# EAGLE board Electronics_Design_PlantSynth_BRD_v130 (EAGLE 9.7.0)
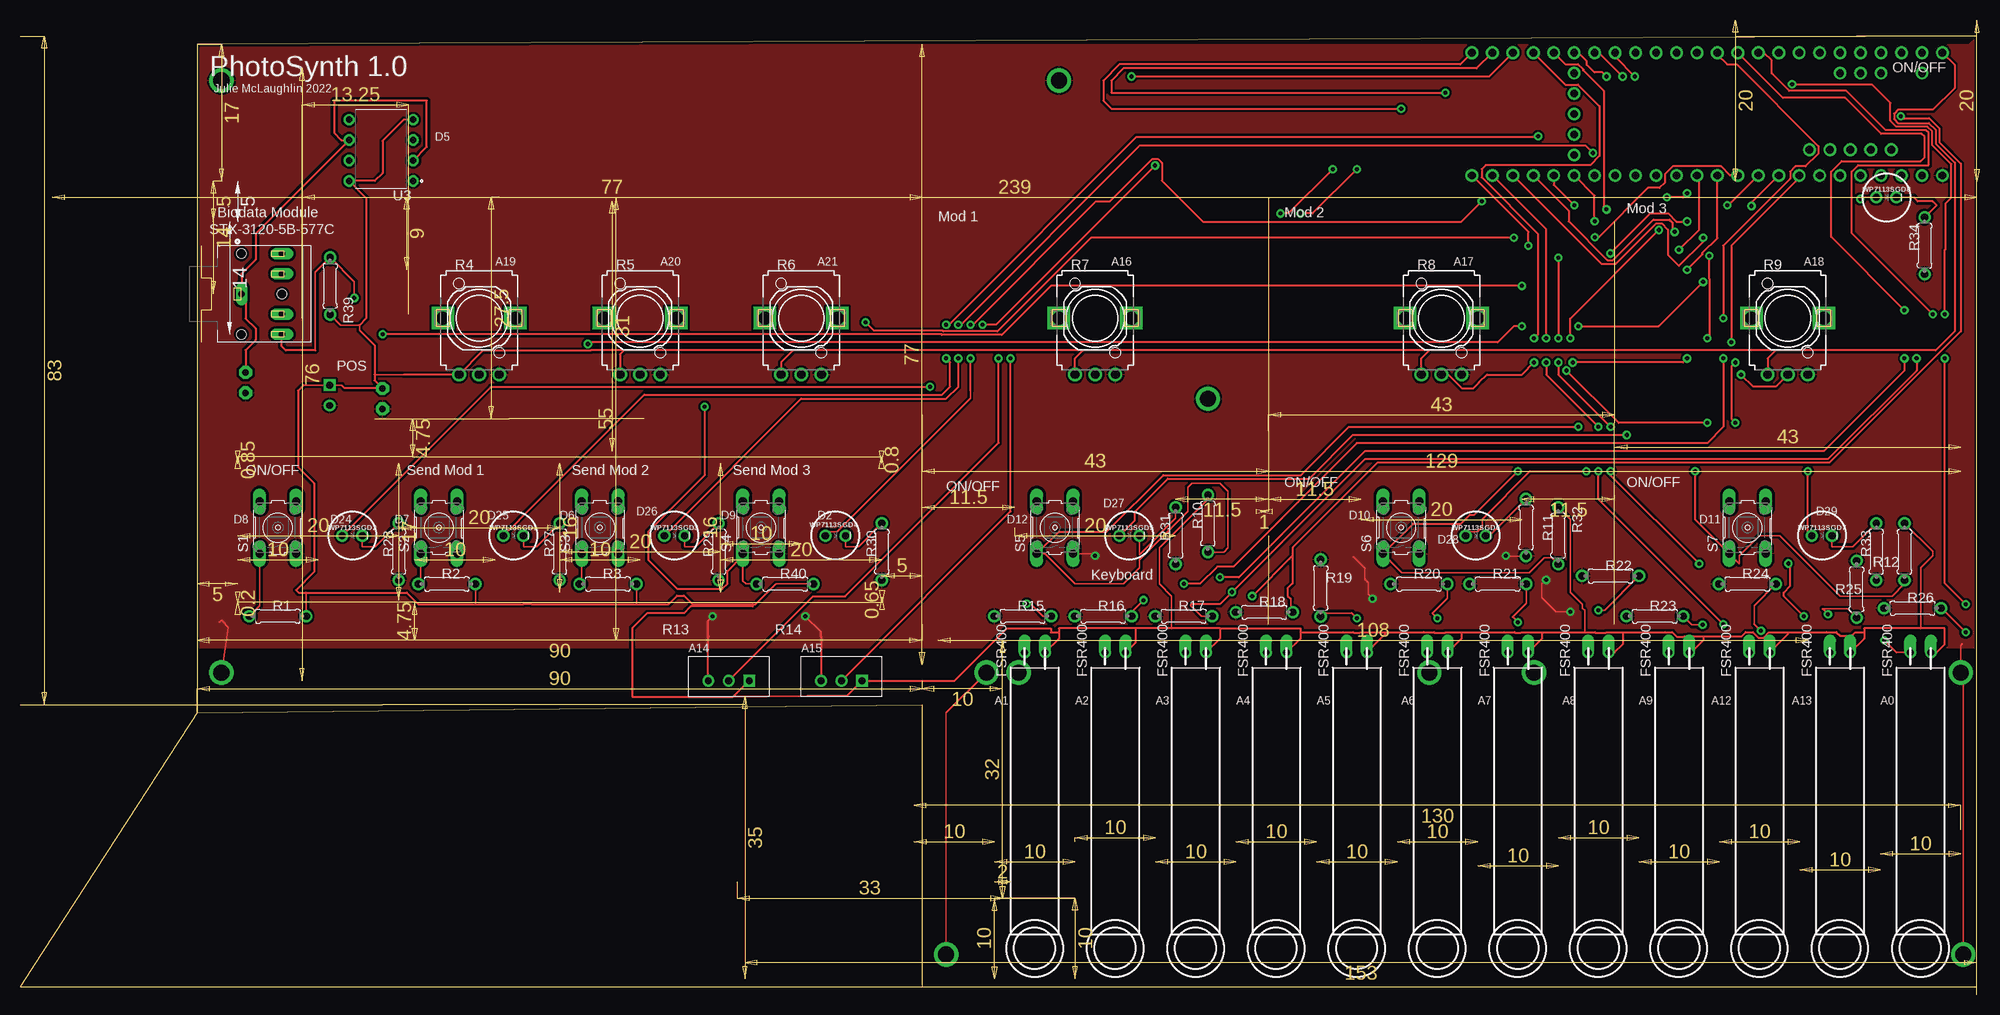
[diagram p0: board, top side]
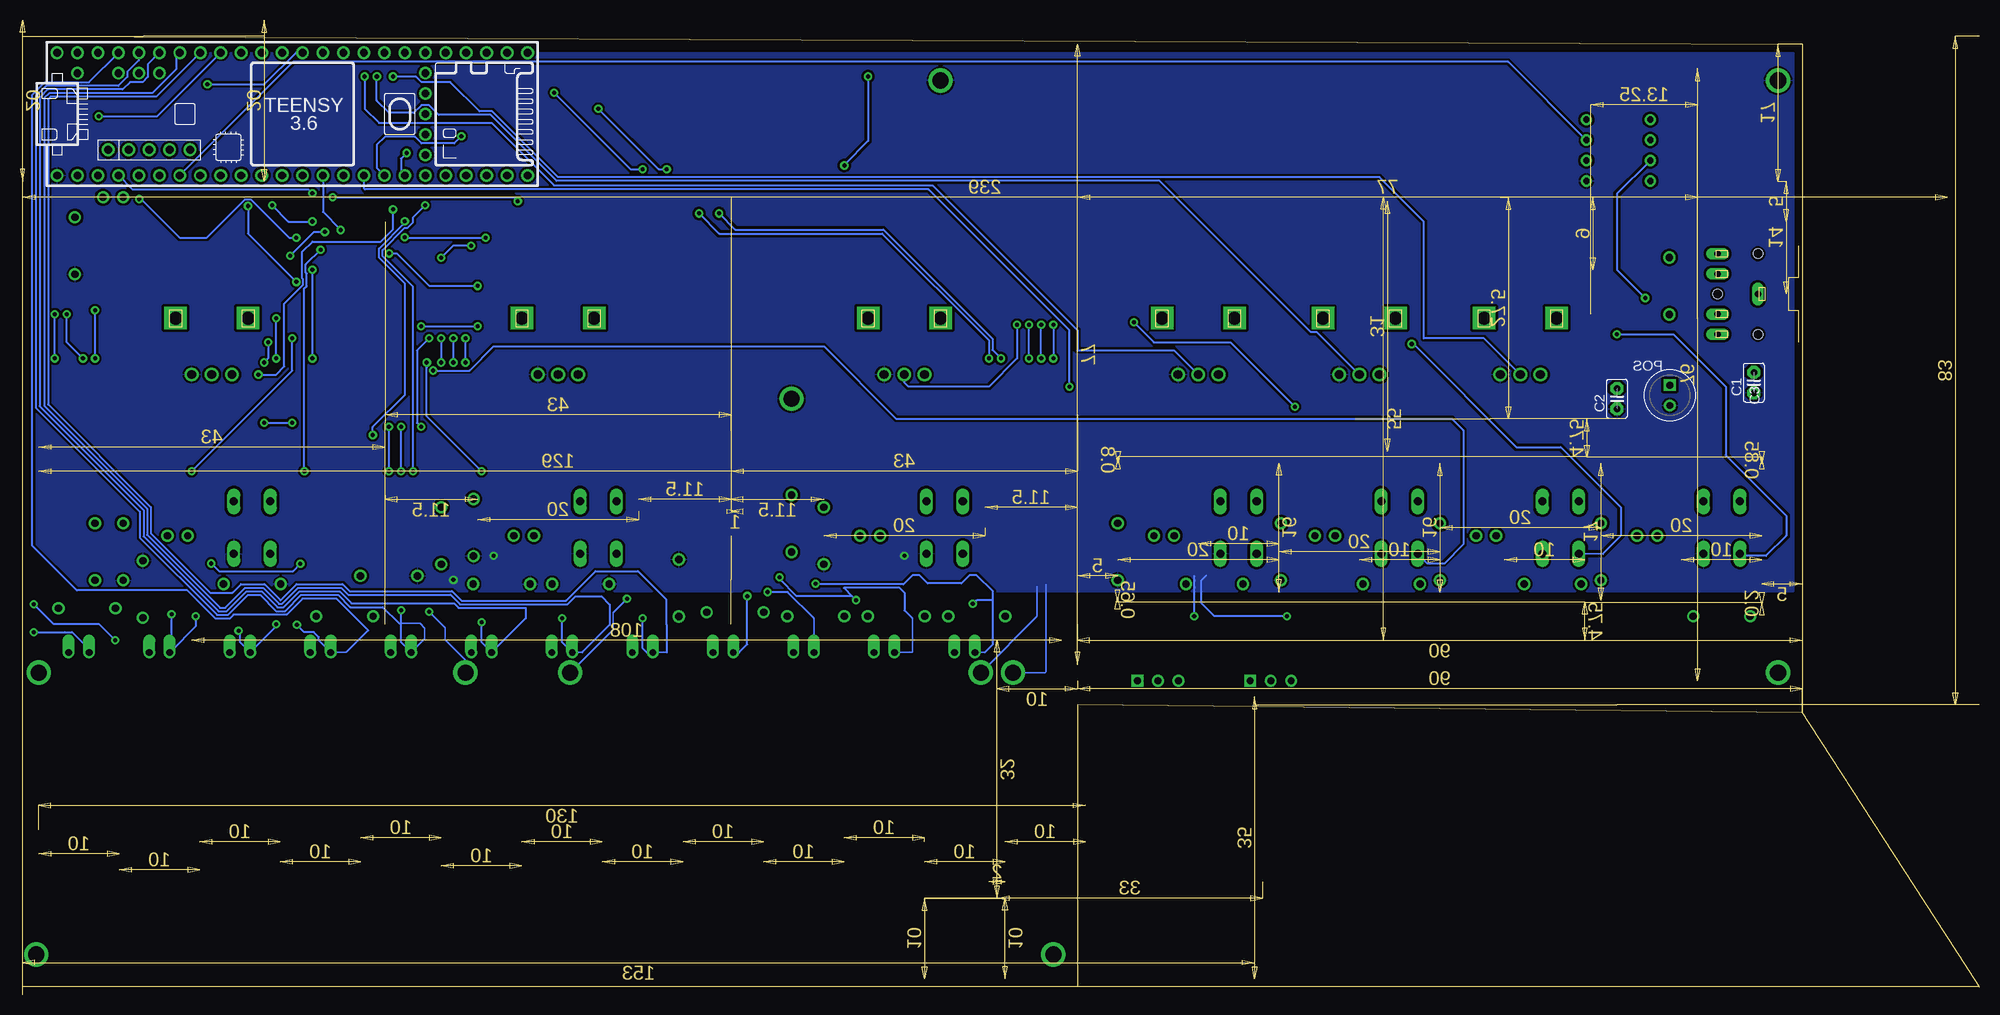
[diagram p1: board, bottom side, seen from below]

Size 243 x 118 mm. Coordinates in mm from the lower left corner, seen from the top.
Outline: 112,0 0,0 22,34
Outline: 112,0 243,0 243,118 22,117 22,34
Outline: 22,34 112,35 112,0
Copper layers (1*16): Top 0.035mm / dielectric 1.5mm / Bottom 0.035mm
Design rules "SparkFun": minimum track width 8mil, minimum drill 20mil, track to track 8mil, track to pad 8mil, pad to pad 8mil, via to via 8mil, smd to smd 8mil, copper to edge 8mil, drill to drill 8mil, minimum pad ring 12mil, minimum via ring 10mil, stop-mask expansion 4mil, vias tented up to drill 20mil, thermal gap 10mil

## Footprints (pad centres in the part's own frame; a part is rotated, then mirrored left to right if it is on the bottom)
C2.5-2 = drill 0.813 pad 1.6 octagon: 1 -1.27,0; 2 1.27,0
ESK476M050AE3EA_47UF_CAP = drill 0.85 pad 1.45 square: LL+ -1.27,0 | drill 0.85 pad 1.45: LL- 1.27,0
FSR400_.85 = drill 0.85 offset: P$1 -1.27,17; P$2 1.27,17
MOUNTEDHOLE = drill 2: P$1 0,0
0204/5 = drill 0.9: 1 -3.54,0; 2 3.54,0
EVUFXL = drill 1.1 pad 1.676: GND 2.5,-7; IN 0,-7; PWR -2.5,-7 | drill 1.6 pad 2.8 square: M1 4.5,0; M2 -4.5,0
B3B-XH-A = drill 0.85: GND -2.545,0; IN -0.005,0 | drill 0.85 square: POWER 2.545,0
B3F-10XX = drill 1.016 long: 1 -3.251,2.261; 2 3.251,2.261; 3 -3.251,-2.261; 4 3.251,-2.261
STX-3120-5B-577C = drill 0.8 long: 1 0.5,0; 2 5.5,-5; 3 5.5,-2.5; 4 5.5,2.5; 5 5.5,5 | hole 1.2: 0.5,5; 5.5,0; 0.5,-5
LMC555CN/NOPB-ND = drill 0.78 pad 1.13: 1 -6.51,5.08; 2 -6.51,2.54; 3 -6.51,0; 4 -6.51,-2.54; 5 1.43,-2.54; 6 1.43,0; 7 1.43,2.54; 8 1.43,5.08
TEENSY_3.5/3.6 = drill 0.965: 0/RX -25.4,-7.62; 1/TX -22.86,-7.62; 2 -20.32,-7.62; 3/CANTX -17.78,-7.62; 3V3 7.62,-7.62; 3V3_2 17.78,-2.54; 3V3_LO -22.86,7.62; 4/CANRX -15.24,-7.62; 5 -12.7,-7.62; 6 -10.16,-7.62; 7 -7.62,-7.62; 8 -5.08,-7.62; 9/CS -2.54,-7.62; 10/CS 0,-7.62; 11/MOSI 2.54,-7.62; 12/MISO 5.08,-7.62; 13/SCK 5.08,7.62; 14/A0 2.54,7.62; 15/A1 0,7.62; 16/A2 -2.54,7.62; 17/A3 -5.08,7.62; 18/A4/SDA -7.62,7.62; 19/A5/SCL -10.16,7.62; 20/A6 -12.7,7.62; 21/A7 -15.24,7.62; 21/DAC0 12.7,7.62; 22/A8 -17.78,7.62; 23/A9 -20.32,7.62; 24 10.16,-7.62; 25 12.7,-7.62; 26 15.24,-7.62; 27 17.78,-7.62; 28 20.32,-7.62; 29 22.86,-7.62; 30 25.4,-7.62; 31/A12 27.94,-7.62; 32/A13 30.48,-7.62; 33/A14 30.48,7.62; 34/A15 27.94,7.62; 35/A16 25.4,7.62; 36/A17 22.86,7.62; 37/A18 20.32,7.62; 38/A19 17.78,7.62; 39/A20 15.24,7.62; A10 -17.78,5.08; A11 -15.24,5.08; A22/DAC1 10.16,7.62; AGND -25.4,7.62; AREF -20.32,5.08; GND -27.94,-7.62; GND2 7.62,7.62; GND3 17.78,0; PROG 17.78,2.54; RESET 17.78,5.08; U5V -21.59,-4.445; UD+ -16.51,-4.445; UD- -19.05,-4.445; UGND1 -13.97,-4.445; UGND2 -11.43,-4.445; VBAT 17.78,-5.08; VIN -27.94,7.62; VUSB -25.4,5.08
LEDGREENDIFFUSED5MM = drill 0.9: A+ -1,0; C- 1.5,0

## Placement (x,y rotation side)
C1  4700pF  [C2.5-2]  28,75 90 bottom
C2  0.1uF  [C2.5-2]  45,73 90 bottom
C3  47uF  [ESK476M050AE3EA_47UF_CAP]  38.43,73.42 270 bottom
FSR1  FSR400_0.85  [FSR400_.85]  126,24.5 0 top
FSR2  FSR400_0.85  [FSR400_.85]  136,24.5 0 top
FSR3  FSR400_0.85  [FSR400_.85]  146,24.5 0 top
FSR4  FSR400_0.85  [FSR400_.85]  156,24.5 0 top
FSR5  FSR400_0.85  [FSR400_.85]  166,24.5 0 top
FSR6  FSR400_0.85  [FSR400_.85]  176,24.5 0 top
FSR7  FSR400_0.85  [FSR400_.85]  186,24.5 0 top
FSR8  FSR400_0.85  [FSR400_.85]  196,24.5 0 top
FSR9  FSR400_0.85  [FSR400_.85]  206,24.5 0 top
FSR10  FSR400_0.85  [FSR400_.85]  216,24.5 0 top
FSR11  FSR400_0.85  [FSR400_.85]  226,24.5 0 top
FSR12  FSR400_0.85  [FSR400_.85]  236,24.5 0 top
GND  MOUNTINGHOLE  [MOUNTEDHOLE]  120,39 0 top
GND37  MOUNTINGHOLE  [MOUNTEDHOLE]  241.3,4 0 top
GND38  MOUNTINGHOLE  [MOUNTEDHOLE]  147.5,73 0 top
R1  10k  [0204/5]  32,46 0 top
R2  10k  [0204/5]  53,50 0 top
R3  10k  [0204/5]  73,50 0 top
R4  EVU-F3LFL3D14F3L  [EVUFXL]  57,83 0 top
R5  EVU-F3LFL3D14F3L  [EVUFXL]  77,83 0 top
R6  EVU-F3LFL3D14F3L  [EVUFXL]  97,83 0 top
R7  EVU-F3LFL3D14F3L  [EVUFXL]  133.5,83 0 top
R8  EVU-F3LFL3D14F3L  [EVUFXL]  176.5,83 0 top
R9  EVU-F3LFL3D14F3L  [EVUFXL]  219.5,83 0 top
R10  10k  [0204/5]  147.5,57.5 90 top
R11  10k  [0204/5]  191,56 90 top
R12  10k  [0204/5]  234,54 90 top
R13  [B3B-XH-A]  88,38 0 top
R14  [B3B-XH-A]  102,38 0 top
R15  10k  [0204/5]  124.5,46 0 top
R16  10k  [0204/5]  134.5,46 0 top
R17  10k  [0204/5]  144.5,46 0 top
R18  10k  [0204/5]  154.5,46.5 0 top
R19  10k  [0204/5]  161.5,49.5 270 top
R20  10k  [0204/5]  173.71,50 0 top
R21  10k  [0204/5]  183.5,50 0 top
R22  10k  [0204/5]  197.5,51 0 top
R23  10k  [0204/5]  203,46 0 top
R24  10k  [0204/5]  214.5,50 0 top
R25  10k  [0204/5]  228.06,49.34 270 top
R26  10k  [0204/5]  235,47 0 top
R27  125  [0204/5]  67,54 90 top
R28  125  [0204/5]  47,54 90 top
R29  125  [0204/5]  86.75,54 90 top
R30  125  [0204/5]  107,54 90 top
R31  125  [0204/5]  143.5,56 90 top
R32  125  [0204/5]  187,57 90 top
R33  125  [0204/5]  230.5,54 90 top
R34  125  [0204/5]  236.5,92 90 top
R39  100k  [0204/5]  38.5,87 270 top
R40  10k  [0204/5]  95,50 0 top
S1  [B3F-10XX]  32,57 90 top
S2  [B3F-10XX]  52,57 90 top
S3  [B3F-10XX]  72,57 90 top
S4  [B3F-10XX]  92,57 90 top
S5  [B3F-10XX]  128.5,57 90 top
S6  [B3F-10XX]  171.5,57 90 top
S7  [B3F-10XX]  214.5,57 90 top
STX-3120-5B-577C  STX-3120-5B-577C  [STX-3120-5B-577C]  27,86 0 top
U3  LMC555CN  [LMC555CN/NOPB-ND]  42.29,105.11 180 top
U$1  TEENSY_3.5/3.6  [TEENSY_3.5/3.6]  210.77,108.34 0 bottom
U$2  MOUNTINGHOLE  [MOUNTEDHOLE]  115,4 0 top
U$3  MOUNTINGHOLE  [MOUNTEDHOLE]  124,39 0 top
U$4  MOUNTINGHOLE  [MOUNTEDHOLE]  175,39 0 top
U$5  MOUNTINGHOLE  [MOUNTEDHOLE]  241,39 0 top
U$6  MOUNTINGHOLE  [MOUNTEDHOLE]  188,39 0 top
U$7  MOUNTINGHOLE  [MOUNTEDHOLE]  25,112.5 0 top
U$8  MOUNTINGHOLE  [MOUNTEDHOLE]  129,112.5 0 top
U$9  MOUNTINGHOLE  [MOUNTEDHOLE]  25,39 0 top
WP7113SGD1  [LEDGREENDIFFUSED5MM]  61,56 0 top
WP7113SGD2  [LEDGREENDIFFUSED5MM]  41,56 0 top
WP7113SGD3  [LEDGREENDIFFUSED5MM]  81,56 0 top
WP7113SGD4  [LEDGREENDIFFUSED5MM]  101,56 0 top
WP7113SGD5  [LEDGREENDIFFUSED5MM]  137.5,56 0 top
WP7113SGD6  [LEDGREENDIFFUSED5MM]  180.5,56 0 top
WP7113SGD7  [LEDGREENDIFFUSED5MM]  223.5,56 0 top
WP7113SGD8  [LEDGREENDIFFUSED5MM]  231.5,98 0 top

## Library data of the parts
C1 C2 = capacitor-wima
C3 = Capacitor_47uF
FSR1-FSR12 = FSR400
GND GND37 GND38 U$2-U$9 = MOUNTEDHOLE
R1-R3 R10-R12 R15-R34 R39 R40 = RESISTOR_Stand
R4-R9 = EVU-F3LFL3D14_US
R13 R14 = Pot_16mm
S1-S7 = B3F-1020_OMRON; MPN: B3F-1000; OC_FARNELL: 176432; OC_NEWARK: 36M3542
STX-3120-5B-577C = STX-3120-5B-577C
U3 = LMC555CN:NOPB-ND
U$1 = Teensy356
WP7113SGD1-WP7113SGD8 = KingBright_LED_WP7113SGD

## Nets
2: U$1.2 WP7113SGD4.A+
3: U$1.3/CANTX
4: U$1.4/CANRX
5: U3.3 U$1.5
6: R3.1 S3.1 U$1.6
7: R2.1 S2.1 U$1.7
8: R1.1 S1.1 U$1.8
9: R40.1 S4.1 U$1.9/CS
10: R11.1 S6.1 U$1.10/CS
11: R12.1 S7.1 U$1.11/MOSI
12: R10.1 S5.1 U$1.12/MISO
24: U$1.24 WP7113SGD2.A+
25: U$1.25 WP7113SGD1.A+
26: U$1.26 WP7113SGD3.A+
27: U$1.27 WP7113SGD5.A+
28: U$1.28 WP7113SGD6.A+
29: U$1.29 WP7113SGD7.A+
30: U$1.30 WP7113SGD8.A+
A0: FSR12.P$1 R26.2 U$1.14/A0
A1: FSR1.P$1 R15.2 U$1.15/A1
A2: FSR2.P$1 R16.2 U$1.16/A2
A3: FSR3.P$1 R17.2 U$1.17/A3
A4: FSR4.P$1 R18.2 U$1.18/A4/SDA
A5: FSR5.P$1 R19.2 U$1.19/A5/SCL
A6: FSR6.P$1 R20.2 U$1.20/A6
A7: FSR7.P$1 R21.2 U$1.21/A7
A8: FSR8.P$1 R22.2 U$1.22/A8
A9: FSR9.P$1 R23.2 U$1.23/A9
A12: FSR10.P$1 R24.2 U$1.31/A12
A13: FSR11.P$1 R25.2 U$1.32/A13
A14: R13.IN U$1.33/A14
A15: R14.IN U$1.34/A15
A16: R7.IN U$1.35/A16
A17: R8.IN U$1.36/A17
A18: R9.IN U$1.37/A18
A19: R4.IN U$1.38/A19
A20: R5.IN U$1.39/A20
A21: R6.IN U$1.21/DAC0
A22: U$1.A22/DAC1
GND: C1.1 C2.1 C3.LL- GND37.P$1 GND38.P$1 GND.P$1 R4.GND R5.GND R6.GND R7.GND R8.GND R9.GND R13.GND R14.GND R15.1 R16.1 R17.1 R18.1 R19.1 R20.1 R21.1 R22.1 R23.1 R24.1 R25.1 R26.1 R27.1 R28.1 R29.1 R30.1 R31.1 R32.1 R33.1 R34.1 S1.3 S2.3 S3.3 S4.3 S5.3 S6.3 S7.3 U3.1 U$1.GND U$2.P$1 U$3.P$1 U$4.P$1 U$5.P$1 U$6.P$1 U$7.P$1 U$8.P$1 U$9.P$1
N$1: R28.2 WP7113SGD2.C-
N$2: R27.2 WP7113SGD1.C-
N$3: R29.2 WP7113SGD3.C-
N$4: R30.2 WP7113SGD4.C-
N$5: R31.2 WP7113SGD5.C-
N$6: R32.2 WP7113SGD6.C-
N$7: R33.2 WP7113SGD7.C-
N$8: R34.2 WP7113SGD8.C-
SLEEVE: C1.2 STX-3120-5B-577C.1 U3.2 U3.6
TIP: R39.1 STX-3120-5B-577C.2 U3.7
VCC: C2.2 C3.LL+ FSR1.P$2 FSR2.P$2 FSR3.P$2 FSR4.P$2 FSR5.P$2 FSR6.P$2 FSR7.P$2 FSR8.P$2 FSR9.P$2 FSR10.P$2 FSR11.P$2 FSR12.P$2 R1.2 R2.2 R3.2 R4.PWR R5.PWR R6.PWR R7.PWR R8.PWR R9.PWR R10.2 R11.2 R12.2 R13.POWER R14.POWER R39.2 R40.2 U3.4 U3.8 U$1.VIN

## Tracks (layer width: path | path; a pad name or v marks a point on that pad's centre or on a via)
2  (via drill 0.51)
  Top 0.203: WP7113SGD4.A+ 100.48,56.48 101.44,56.48 118,73.04 118,74
  Top 0.243: 118,74 v118,78 | v207,98.5 206.5,98 v204.5,98 | v181.5,97.5 179,95 146.86,95 141.78,100.08 141.78,102.29 141.29,102.78 140.6,102.78 135.32,97.5 133.62,97.5 118.32,82.2 v118,82.2
  Bottom 0.243: v181.5,97.5 182,98 v204.5,98 | v207,98.5 207.5,99 229.37,99 U$1.2 | v118,78 v118,82.2
5
  Bottom 0.243: U3.3 58.52,114.83 209.37,114.83 U$1.5
6  (via drill 0.51)
  Top 0.203: S3.1 69.74,50.41 69.46,50.13 R3.1
  Top 0.243: U$1.6 220.93,100.43 212.5,92 v212.5,80 | v213,77.5 212.5,77 212.5,70.5 v213,70 | v209.5,70 198.5,70 v192,76.5
  Bottom 0.203: 69.74,53.74 S3.1
  Bottom 0.243: v212.5,80 212.5,78 v213,77.5 | v213,70 v209.5,70 | v192,76.5 187.5,76.5 184.5,79.5 143.5,79.5 134.5,70.5 65.5,70.5 64.08,69.08 64.08,54.92 66.46,52.54 68.54,52.54 69.74,53.74
7  (via drill 0.51)
  Top 0.203: S2.1 49.74,50.41 49.46,50.13 R2.1
  Top 0.243: U$1.7 215,97.33 v215,96.93 | v186.5,82 185.5,82 183.5,80 70.7,80 v70.5,79.8 | v193.5,82 203.49,82 v208.99,87.5
  Bottom 0.203: 46.75,53.75 S2.1
  Bottom 0.243: v193.5,82 v186.5,82 | 46.75,53.75 44.5,56 44.5,59.5 52,67 57.5,67 70.3,79.8 v70.5,79.8 | v208.99,87.5 215,93.51 v215,96.93
8  (via drill 0.51)
  Top 0.203: S1.1 29.74,50.5 29.74,50.41 29.74,47.28 R1.1
  Top 0.243: U$1.8 212.12,97 v212,97 | v186.5,87 128,87 121.92,80.92 114.47,80.92 114.39,81 v45,81 | v207,95 205.67,95 204.67,96 202.43,96 v197.46,91.04
  Bottom 0.203: 29.49,53.5 S1.1
  Bottom 0.243: v212,97 210,95 v207,95 | v186.5,87 192.5,87 196.54,91.04 v197.46,91.04 | v45,81 38,81 31.5,74.5 31.5,66 24,58.5 24,56 26.5,53.5 29.49,53.5
9  (via drill 0.51)
  Top 0.203: S4.1 89.74,53.5 | R40.1 90.15,50 89.74,50.41
  Top 0.243: 89.74,50.41 89.74,53.5 87.83,51.59 87.83,50.01 87.19,49.38 81.61,49.38 78,52.99 78,56.5 85,63.5 v85,72 | v185.5,93 133,93 121.37,81.37 114.66,81.37 114.58,81.45 106.05,81.45 v105,82.5 | v195.54,93.04 196.04,93.04 202.16,99.16 203.59,99.16 204.26,99.83 204.26,100.87 205.23,101.83 211.23,101.83 212.34,100.72 U$1.9/CS
  Bottom 0.243: v185.5,93 195.5,93 v195.54,93.04 | v105,82.5 102.5,80 93,80 v85,72
10  (via drill 0.51)
  Top 0.203: 172.99,57.5 S6.1 171.59,51.4 187.44,51.4 189.27,53.23 190.23,53.23 R11.1
  Top 0.243: v207,78 206.5,77.5 v192.8,77.5 | v207,89 208.91,90.91 208.91,91.1 210.77,92.95 U$1.10/CS | v186,64 180.62,58.62 180.05,58.62 178.93,57.5 172.99,57.5
  Bottom 0.243: v207,78 v207,89 | v192.8,77.5 192.8,76.88 192.83,76.84 192.83,70.83 v186,64
11  (via drill 0.51)
  Top 0.203: 208,57.99 S7.1 213.49,52.49 213.49,53.49 216,56 218.5,56 226,48.5 232.5,48.5 234,50 R12.1
  Top 0.243: 208,57.99 v208,64 | U$1.11/MOSI 208.5,100.45 208.5,94 v206,91.5
  Bottom 0.243: v208,64 208,86.68 207.71,86.97 207.71,88.54 207.83,88.66 207.83,89.67 v206,91.5
12  (via drill 0.51)
  Top 0.203: 128.99,56.5 S5.1 127.25,53.75 131,50 137,50 139,52 139,53 145,59 145,62 145.5,62.5 149,62.5 150,61.5 150,54.5 149.46,53.96 R10.1
  Top 0.243: v193.5,69.5 165,69.5 159.03,63.53 141.96,63.53 134.93,56.5 128.99,56.5 | v192.5,80.5 192.5,82.95 v203.5,93.95
  Bottom 0.243: v193.5,69.5 194,70 194,79 v192.5,80.5 | U$1.12/MISO 205.69,96.19 203.5,94 v203.5,93.95
24  (via drill 0.51)
  Top 0.203: WP7113SGD2.A+ 58.5,74.5
  Top 0.243: 58.5,74.5 v113,74.5
  Bottom 0.243: v113,74.5 113,81.5 130.5,99 200.5,99 200.61,99.11 U$1.24
25  (via drill 0.51)
  Top 0.203: WP7113SGD1.A+ 61.94,57.94 61.94,57.98 77.46,73.5 77.5,73.5
  Top 0.243: 77.5,73.5 114.5,73.5 115.5,74.5 115.5,77.5 v115,78 | v188.5,105.58 188.42,105.5 138.62,105.5 115.32,82.2 v115,82.2
  Bottom 0.243: U$1.25 199,101.66 199,104.5 198,105.5 194.26,105.5 193.45,104.69 189.39,104.69 v188.5,105.58 | v115,82.2 v115,78
26  (via drill 0.51)
  Top 0.203: WP7113SGD3.A+ 97,73
  Top 0.243: 97,73 115,73 116.5,74.5 v116.5,78 | v195.3,103.5 195.3,103.52 194.45,104.38 139,104.38 116.82,82.2 v116.5,82.2
  Bottom 0.243: U$1.26 196,101.19 196,102.8 v195.3,103.5 | v116.5,78 v116.5,82.2
27  (via drill 0.51)
  Top 0.243: v199.5,68.5 165.5,68.5 160.08,63.08 142.51,63.08 138.42,58.99 138.42,57.92 WP7113SGD5.A+ | U$1.27 195.5,98.21 195.5,95.06 v195.53,95.03
  Bottom 0.243: v199.5,68.5 199.5,69.5 195.5,73.5 195.5,87.27 198.74,90.51 198.74,91.64 195.53,94.85 v195.53,95.03
28  (via drill 0.51)
  Top 0.203: WP7113SGD6.A+ 179.98,56.48 180.94,56.48 181.56,57.1 181.56,58.06 187.5,64
  Top 0.243: 187.5,64 v194.5,64 | v193,97 190.45,99.55 U$1.28
  Bottom 0.243: v193,97 194.5,95.5 194.5,94.88 195.19,94.2 195.55,94.2 198.3,91.45 198.3,90.69 194.5,86.9 v194.5,64
29  (via drill 0.51)
  Top 0.203: WP7113SGD7.A+ 222,56.5
  Top 0.243: 222,56.5 v222,64 | U$1.29 192.3,96.33 192.3,95.03 197.12,90.2 197.81,90.2 202.83,95.23 204.81,95.23 205.15,94.89 205.15,94.01 v205.46,93.7 | v209.75,90.75 209.75,87.92 209.83,87.84 209.83,80.83 v209.5,80.5
  Bottom 0.243: v222,64 209.5,76.5 v209.5,80.5 | v209.75,90.75 206.8,93.7 v205.46,93.7
30  (via drill 0.51)
  Top 0.203: WP7113SGD8.A+ 228.7,98
  Top 0.243: v209,93 209,92.51 206,89.51 204.62,90.88 204.62,94 203.84,94.78 203.16,94.78 198.13,89.76 196.33,89.76 U$1.30 | 228.7,98 v228.5,97.8
  Bottom 0.243: v228.5,97.8 228.3,97.8 223.5,93 220.11,93 215.34,97.76 214.66,97.76 209.89,93 v209,93
A0  (via drill 0.51)
  Top 0.203: FSR12.P$1 233,41.5 | R26.2 238.61,47 240.11,45.5
  Top 0.243: 233,41.5 v231.5,43 | v241.61,47.5 239,50.11 v239,78 | v241.61,44 240.11,45.5 | v220.04,112.04 220.07,112 230,112 232.26,109.74 232.26,107.53 233.01,106.78 236.85,106.78 237.45,106.19 237.45,104.48 239.82,102.11 239.82,97.96 239.12,97.26 239.12,91.55 239,91.43 v239,83.5
  Bottom 0.203: 234.73,41.91 FSR12.P$1
  Bottom 0.243: v231.5,43 233.5,45 239.11,45 v241.61,47.5 | v239,78 v239,83.5 | U$1.14/A0 209.04,115.96 212.96,112.04 v220.04,112.04 | v241.61,44 237.72,44 237.71,44.01 236.83,44.01 234.73,41.91
A1  (via drill 0.51)
  Top 0.203: R15.2 127,46 125.35,47.65
  Top 0.243: v211.5,78 211.5,69.5 209.5,67.5 165.99,67.5 150.66,52.17 148.66,52.17 146.53,50.03 v144.53,50.03 | v211.5,83 211.5,92 219.81,100.31 219.81,101.18 220.47,101.83 221.71,101.83 223.31,103.44 223.31,104.36 213.17,114.5 212,114.5 210.77,115.73 U$1.15/A1 | v125,47.53 125.12,47.65 125.35,47.65
  Bottom 0.203: 123.5,41.5 FSR1.P$1
  Bottom 0.243: 123.5,41.5 122.5,42.5 122.5,48 | v211.5,78 v211.5,83 | 122.5,48 124.43,48 124.51,47.92 124.61,47.92 v125,47.53 | 122.5,48 122.5,49.07 124.51,51.08 125.41,51.08 126.41,50.08 130.59,50.08 131.59,51.08 132.49,51.08 133.62,49.95 144.44,49.95 v144.53,50.03
A2  (via drill 0.51)
  Top 0.203: R16.2 138.04,46.54 v139.5,48
  Top 0.243: v234,78 234,76.5 224,66.5 167,66.5 151.33,50.83 v149,50.83 | v234,84 224.9,93.11 224.9,101.18 226.21,102.5 236,102.5 236.5,103 236.5,105.5 236.11,105.89 231.11,105.89 226.65,110.35 218.92,110.35 U$1.16/A2
  Bottom 0.203: FSR2.P$1 132.55,41.5 132.5,41.55 132.5,45.73
  Bottom 0.243: v234,78 v234,84 | 140,48.5 141,49.5 134.07,49.5 133.5,48.93 133.5,46.73 132.5,45.73 | 140,48.5 v139.5,48 | 140,48.5 146.87,48.5 149,50.63 v149,50.83
A3  (via drill 0.51)
  Top 0.203: R17.2 146.7,46 145.35,47.35
  Top 0.243: v235.5,78 235.5,76.5 224.5,65.5 167,65.5 v150.5,49 149,47.5 145.5,47.5 145.35,47.35 | U$1.17/A3 216.54,115.96 217.5,115 217.5,113.39 219.69,111.2 226.8,111.2 231.67,106.33 236.67,106.33 237,106 237,102 228.25,102 227.44,101.18 227.44,93.56 v237.5,83.5
  Bottom 0.203: FSR3.P$1 144.73,45.73
  Bottom 0.243: v150.5,49 148,49 144.73,45.73 | v235.5,78 237.5,80 v237.5,83.5
A4  (via drill 0.51)
  Top 0.203: R18.2 157.79,46.75 157.79,48.14
  Top 0.243: 158,53.5 158,54.5 168.55,65.05 224.69,65.05 241,81.37 241,102.19 238.34,104.85 238.34,106.56 237.06,107.84 233.76,107.84 v233.54,108.06 | v153,48.5 158,53.5 | 158,53.5 158,50.07 157.38,49.45 157.38,48.55 157.79,48.14
  Bottom 0.203: FSR4.P$1 154,41.5
  Bottom 0.243: v153,48.5 153,42.5 154,41.5 | U$1.18/A4/SDA 226.25,108.1 233.5,108.1 v233.54,108.06
A5  (via drill 0.51)
  Top 0.203: R19.2 161.92,46.38 165.38,46.38
  Top 0.243: 165.38,46.38 v166,45.75
  Bottom 0.203: 163,41.5 FSR5.P$1 165.5,41.5
  Bottom 0.243: U$1.19/A5/SCL 226.39,110.5 239.5,110.5 239.83,110.17 239.83,72.29 227.08,59.54 227.08,56.27 219.73,48.92 216.92,48.92 215.87,49.97 212.96,49.97 210.96,47.97 208.96,49.97 203.26,49.97 202.4,49.11 189.68,49.11 188.49,47.92 175.51,47.92 171.85,51.58 166.58,51.58 163.08,48.08 163.08,45.01 163,44.93 163,41.5 | v166,45.75 166,42 165.5,41.5
A6  (via drill 0.51)
  Top 0.203: R20.2 177.25,48.25 175.38,46.38
  Top 0.243: 175.38,46.38 v176,45.75
  Bottom 0.203: 173.5,41.5 FSR6.P$1 176,42.77
  Bottom 0.243: U$1.20/A6 223.95,115.48 223.95,113.91 226.91,110.95 239.69,110.95 240.28,110.35 240.28,72.11 227.53,59.36 227.53,56.09 218.49,47.05 217.84,47.05 215.35,49.53 213.15,49.53 211.15,47.53 210.78,47.53 208.77,49.53 203.44,49.53 202.58,48.66 189.86,48.66 188.67,47.47 175.33,47.47 174.33,48.47 171.11,48.47 170.09,47.45 170.09,44.91 173.5,41.5 | 176,42.77 v176,45.75
A7  (via drill 0.51)
  Top 0.203: R21.2 187.04,47.59 185.35,45.91
  Top 0.243: 185.35,45.91 v186,45.25
  Bottom 0.203: 186,42.77 FSR7.P$1 180.5,45.73
  Bottom 0.243: 186,42.77 v186,45.25 | U$1.21/A7 227.44,114.53 227.44,112.96 228.09,112.31 229.66,112.31 230.58,111.39 239.87,111.39 240.89,110.37 240.89,72.09 227.97,59.17 227.97,55.9 218.67,46.6 217.65,46.6 215.17,49.08 213.33,49.08 211.33,47.08 210.59,47.08 208.59,49.08 203.63,49.08 202.14,47.59 189.42,47.59 188.86,47.03 180.5,47.03 180.5,45.73
A8  (via drill 0.51)
  Top 0.203: R22.2 196.79,46.75 v196,46.75
  Bottom 0.203: 196,42.77 FSR8.P$1 193.04,43.19 193.04,44.49 193.65,45.1 196.23,45.1
  Bottom 0.243: 196,42.77 v196,46.75 | U$1.22/A8 228.55,115 229.97,113.57 229.97,112.96 231.1,111.84 240.06,111.84 241.34,110.56 241.34,71.91 228.42,58.99 228.42,55.72 218.85,46.15 217.47,46.15 214.98,48.63 213.52,48.63 211.51,46.63 210.41,46.63 208.4,48.63 203.81,48.63 202.31,47.13 198.26,47.13 196.23,45.1
A9  (via drill 0.51)
  Top 0.203: R23.2 207.61,44.93 v208.93,44.93
  Bottom 0.203: 206,42.77 FSR9.P$1 202.79,41.5 200.05,44.24
  Bottom 0.243: U$1.23/A9 234.76,112.29 240.24,112.29 241.79,110.74 241.79,54.72 236.27,49.2 222.54,49.2 219.04,45.71 217.28,45.71 216.8,46.19 210.22,46.19 208.22,48.19 204,48.19 200.05,44.24 | v208.93,44.93 208.01,44.01 206.83,44.01 206.22,43.4 206.22,42.98 206,42.77
A12  (via drill 0.51)
  Top 0.203: R24.2 215.35,47.31 215.35,45.01
  Top 0.243: v211.5,45 196,60.5 v196,64 | v196,69.5 189.5,76 v189.5,77.5 | v189.5,80.5 189.5,94.05 U$1.31/A12 | v216.18,44.18 215.35,45.01
  Bottom 0.203: 216,42.77 FSR10.P$1 211.5,44.73
  Bottom 0.243: 216,42.77 216,44 v216.18,44.18 | 211.5,44.73 v211.5,45 | v196,64 v196,69.5 | v189.5,80.5 v189.5,77.5
A13  (via drill 0.51)
  Top 0.203: R25.2 226.95,46.91 223.85,46.91
  Top 0.243: v221.5,46 219,48.5 219,48.93 219.82,49.75 219.82,52.3 v219.57,52.55 | v208.5,52.5 197.5,63.5 v197.5,64 | v197.5,69.5 191,76 v191,77.5 | v191,90.5 v191,80.5 | U$1.32/A13 187.3,93.71 v187.3,92 | 223.85,46.91 v224.5,46.25
  Bottom 0.203: FSR11.P$1 224.75,41.52 224.71,41.52 224.5,41.73 221.5,44.73
  Bottom 0.243: v221.5,46 221.5,44.73 | v197.5,64 v197.5,69.5 | v191,80.5 v191,77.5 | v191,90.5 189.5,92 v187.3,92 | 224.5,41.73 v224.5,46.25 | v219.57,52.55 218.6,51.58 209.42,51.58 v208.5,52.5
A14  (via drill 0.51)
  Top 0.243: U$1.33/A14 178.82,114.5 136.5,114.5 134.5,112.5 134.5,110 135.5,109 v171.5,109 | v163,101.5 157.5,96 v156.5,96 | R13.IN 98.45,48.46 102.45,48.46 121.5,67.51 v121.5,78
  Bottom 0.243: v171.5,109 164,101.5 v163,101.5 | v156.5,96 154.5,94 136.11,94 122.55,80.44 122.55,79.05 v121.5,78
A15  (via drill 0.51)
  Top 0.243: U$1.34/A15 180.87,114 137,114 135.5,112.5 135.5,111 v177,111 | v166,101.5 160.5,96 v159,96 | v123,78 123,59.01 R14.IN
  Bottom 0.243: v177,111 167.5,101.5 v166,101.5 | v159,96 156.5,93.5 136.24,93.5 123,80.26 v123,78
A16  (via drill 0.51)
  Top 0.243: U$1.35/A16 182.41,113 v138,113 | v140.95,101.95 121.2,82.2 v119.5,82.2
  Bottom 0.243: v138,113 138,105 140.95,102.05 v140.95,101.95 | R7.IN 133.5,75 133,74.5 123,74.5 119.5,78 v119.5,82.2
A17  (via drill 0.51)
  Top 0.243: v188,77.5 186.5,76 182.15,76 181.18,75.03 181.18,75.01 180.49,74.32 179.01,74.32 177.33,76 R8.IN | v188,80.5 188.5,81 188.5,93.48 181.5,100.48 181.5,101.5 182,102 194.98,102 196.13,103.16 196.13,109.31 193.44,112 191.87,112 U$1.36/A17
  Bottom 0.243: v188,77.5 v188,80.5
A18  (via drill 0.51)
  Top 0.243: R9.IN 218,74.5 215.2,74.5 v213.7,76 | v197,96.5 196.64,96.86 196.64,111.23 194.1,113.77 194.1,113.88 193.45,114.53 191.88,114.53 U$1.37/A18
  Bottom 0.243: v213.7,76 211.5,76 210.5,77 210.5,84.81 208.16,87.16 208.16,87.84 208.28,87.96 208.28,91.22 207,92.5 198.51,92.5 197,94.01 v197,96.5
A19  (via drill 0.51)
  Top 0.243: v197,113 196.5,113.5 195.5,113.5 194.55,114.45 194.55,114.9 193.49,115.96 U$1.38/A19
  Bottom 0.243: R4.IN 61.5,80.5 69,80.5 69,95 74.5,100.5 176.5,100.5 184.68,108.67 186.26,108.67 189.89,112.31 193.45,112.31 194.14,113 v197,113
A20  (via drill 0.51)
  Top 0.243: v199,113 196.04,115.96 U$1.39/A20
  Bottom 0.243: R5.IN 82.28,81.28 83.03,81.28 101.81,100.05 176.69,100.05 184.86,108.23 191.3,108.23 192.53,109.45 193.45,109.45 194.4,108.5 197.5,108.5 199,110 v199,113
A21  (via drill 0.51)
  Top 0.243: v200.5,113 198.07,115.43 U$1.21/DAC0
  Bottom 0.243: R6.IN 100,79 112,79 112,81.5 130,99.5 177,99.5 184.73,107.23 198.73,107.23 200.5,109 v200.5,113
GND  (via drill 0.51)
  Top 0.203: 241.16,42.55 241,42.4 U$5.P$1 241.3,38.7 GND37.P$1 | 165.58,53.35 166.98,51.96 166.98,50.56 167.41,50.13 167.41,48.7 v167.95,48.16 | v192.51,46.56 190.72,46.56 189,48.28 189,50 v189.5,50.5 | S5.3 133.25,53.75 v133.5,53.5 | R32.1 184.54,53.46 v184.5,53.5 | U$9.P$1 25.87,44.63 25,45.5 24.75,45.25 | U$2.P$1 115,34 GND.P$1
  Top 0.243: R13.GND 85.45,43.45 | 85.5,43.5 85.45,43.45 | 99.45,43.45 R14.GND | 99.45,43.45 99.5,43.5 | 99.45,43.45 99.45,44.05 v97.5,46 | 85.45,43.45 85.45,45.45 v86,46
  Bottom 0.203: 115.92,49.97 115.92,39.08 116,39 GND.P$1 | U$3.P$1 117,46 117,49.75 | U$6.P$1 188,40.55 190.53,43.08 190.53,44.59 v192.51,46.56 | v167.95,48.16 169.66,46.45 169.66,44.34 U$4.P$1
  Bottom 0.243: v86,46 95,46 96.62,47.62 96.62,50.45 96.03,51.03 | v97.5,46 97.5,49.51 97.46,49.55 97.46,50.45 97.5,50.49 97.5,51
  pour Top (isolate 0.31): 22,117 242,117 243,118 243,42 22,42
  pour Bottom (isolate 0.31): 23,116 241,116 242,117 242,49 23,49
N$1
  Top 0.203: WP7113SGD2.C- 42.5,54.65 44.11,54.65 R28.2
N$2
  Top 0.203: WP7113SGD1.C- 62.5,54.65 64.11,54.65 R27.2
N$3
  Top 0.203: WP7113SGD3.C- 82.5,54.65 83.86,54.65 R29.2
N$4
  Top 0.203: WP7113SGD4.C- 102.5,54.65 104.11,54.65 R30.2
N$5
  Top 0.203: WP7113SGD5.C- 139,53.65 143.5,58.15 R31.2
N$6
  Top 0.203: WP7113SGD6.C- 182,55.54 R32.2
N$7
  Top 0.203: WP7113SGD7.C- 225,54.65 227.61,54.65 R33.2
N$8
  Top 0.203: WP7113SGD8.C- 235.14,98 | 237.98,97.02 R34.2
  Top 0.243: 237.98,97.02 237.5,97.5 235.64,97.5 235.14,98
SLEEVE
  Top 0.243: U3.2 50.5,104.27 50.5,110 39,110 39,106 39.89,105.11 U3.6 29.24,93.49 29.24,90.28 27.5,88.54 STX-3120-5B-577C.1 28,85.5 28,82.96 29.24,81.72 29.24,80.28 28,79.04 C1.2
TIP  (via drill 0.51)
  Top 0.203: v41.5,85.5 41.5,87.54 R39.1 36.65,88.69 36.65,79
  Top 0.243: 36.65,79 33,79 32.5,79.5 STX-3120-5B-577C.2
  Bottom 0.243: U3.7 45,98.43 45,89 v41.5,85.5
VCC
  Top 0.203: 129,43.23 FSR1.P$2 | FSR2.P$2 138.5,42.73 | FSR3.P$2 149,43.23 | FSR4.P$2 159,43.23 | FSR5.P$2 169.5,43.73 | FSR6.P$2 179,43.23 | FSR7.P$2 189,43.23 | FSR8.P$2 198,41.5 | 207.5,41.5 FSR9.P$2 | FSR10.P$2 219.5,43.73 | FSR11.P$2 229,43.23 | FSR12.P$2 238,41.5 | 35.19,74.69 C3.LL+ 39.95,74.69 40.33,74.31 | R39.2 39.81,82.15 42.15,82.15 42.15,81.5 44,79.65 | 44,76 47.65,76 | 35.5,48.92 35.54,48.88 R1.2 | R2.2 56.54,47.54 56.5,47.5 | R3.2 76.54,47.54 76.5,47.5 | R40.2 93.85,50 91.35,47.5 | 91,47.5 91,47.2 | R11.2 192.5,58.04 192.5,49 194,47.5 194,47 194.29,46.71 194.29,44.01 | R12.2 237.5,54.04 237.5,53.5 236,52 236,44.5 | R10.2 147.5,60.5 141.5,54.5 141.5,50 143,48.5 143,44.5
  Top 0.243: 218,79 175,79 | 175,79 132,79 | 132,79 96,79 | 96,79 75,79 | R9.PWR 217,78 218,79 | R8.PWR 174,78 175,79 | R7.PWR 131,78 132,79 | R6.PWR 94.5,77.5 96,79 | R5.PWR 74.5,78.5 75,79 | 47.65,76 R4.PWR 57.46,78.96 70.84,78.96 70.88,79 75,79 | 44,79.65 44,76 44,75.27 C2.2 44.96,74.31 40.33,74.31 | U3.4 47.65,107.65 45,105 45,101 44.03,100.03 U3.8 43,97.89 43,83 42.15,82.15 | 88.55,36 76,36 76,44.5 77.88,46.38 82.45,46.38 83.27,47.2 91,47.2 | 88.55,36 R13.POWER | 88.55,36 92.75,36 102.66,36.11 R14.POWER 116.03,38 122.53,44.5 128,44.5 128,44 129,44 | 138.5,44.5 129,44.5 129,44 | 149,44.5 143,44.5 138.5,44.5 | 149,44.5 159,44.5 159,44 | 219.5,44 218,44 217.18,44 216.52,43.35 215.83,43.35 215.17,44.01 214.29,44.01 213.79,43.51 209,43.51 | 238,41.5 239,42.5 239,44.5 236,44.5 229,44.5 229,44 | 229,44 229,43.23 | 219.5,44 219.5,43.73 | 209,43.51 209,43 207.5,41.5 | 199,44 199,42.5 198,41.5 | 189,44 189,43.23 | 179,44 179,43.23 | 169.5,44 169.5,43.73 | 159,44 159,43.23 | 149,44.5 149,43.23 | 138.5,44.5 138.5,42.73 | 129,44 129,43.23 | 179,44 176.99,44 176.91,43.92 175.66,43.92 175.56,44.01 174.29,44.01 174.28,44 169.5,44 | 199,44 196.99,44 196.91,43.92 195.66,43.92 195.56,44.01 194.29,44.01 194.28,44 189,44 | U$1.VIN 240.22,114.45 240.22,111.57 237.53,108.89 233.19,108.89 232.7,108.41 232.7,107.72 233.19,107.23 237.04,107.23 237.89,106.37 237.89,104.67 240.27,102.3 240.27,81.4 237.87,79 218,79 | 35.19,74.69 34.5,74 34.5,64.5 36.5,62.5 36.5,51.5 34.25,49.25 34.58,48.92 35.5,48.92 48.01,48.92 49.43,47.5 56.5,47.5 62.51,47.5 62.55,47.54 63.45,47.54 63.49,47.5 76.5,47.5 80.51,47.5 81.55,48.54 82.45,48.54 83.49,47.5 91,47.5 91.35,47.5
  Top 0.243: 199,44 204.28,44 204.29,44.01 205.17,44.01 205.73,43.45 206.63,43.45 206.69,43.51 209,43.51 | 179,44 184.28,44 184.29,44.01 185.56,44.01 185.66,43.92 186.35,43.92 186.43,44 189,44 | 159,44 164.28,44 164.29,44.01 165.56,44.01 165.66,43.92 166.35,43.92 166.43,44 169.5,44 | 219.5,44 224.28,44 224.29,44.01 225.56,44.01 226.01,43.57 227.45,43.57 227.88,44 229,44

## Text on the board
_tsilk: PhotoSynth 1.0 | ON/OFF | Julie McLaughlin 2022 | D5 | Mod 3 | Biodata Module | Mod 1 | Mod 2 | A19 | A20 | A21 | A16 | A17 | A18 | POS | ON/OFF | Send Mod 1 | Send Mod 2 | Send Mod 3 | ON/OFF | ON/OFF | ON/OFF | D26 | D27 | D29 | D25 | D6 | D9 | D2 | D10 | D8 | D24 | D7 | D12 | D11 | D28 | Keyboard | A14 | A15 | A1 | A2 | A3 | A4 | A5 | A6 | A7 | A8 | A9 | A12 | A13 | A0
_bsilk: POS